# EAGLE board TD8Edaughter (EAGLE 6.6.0)
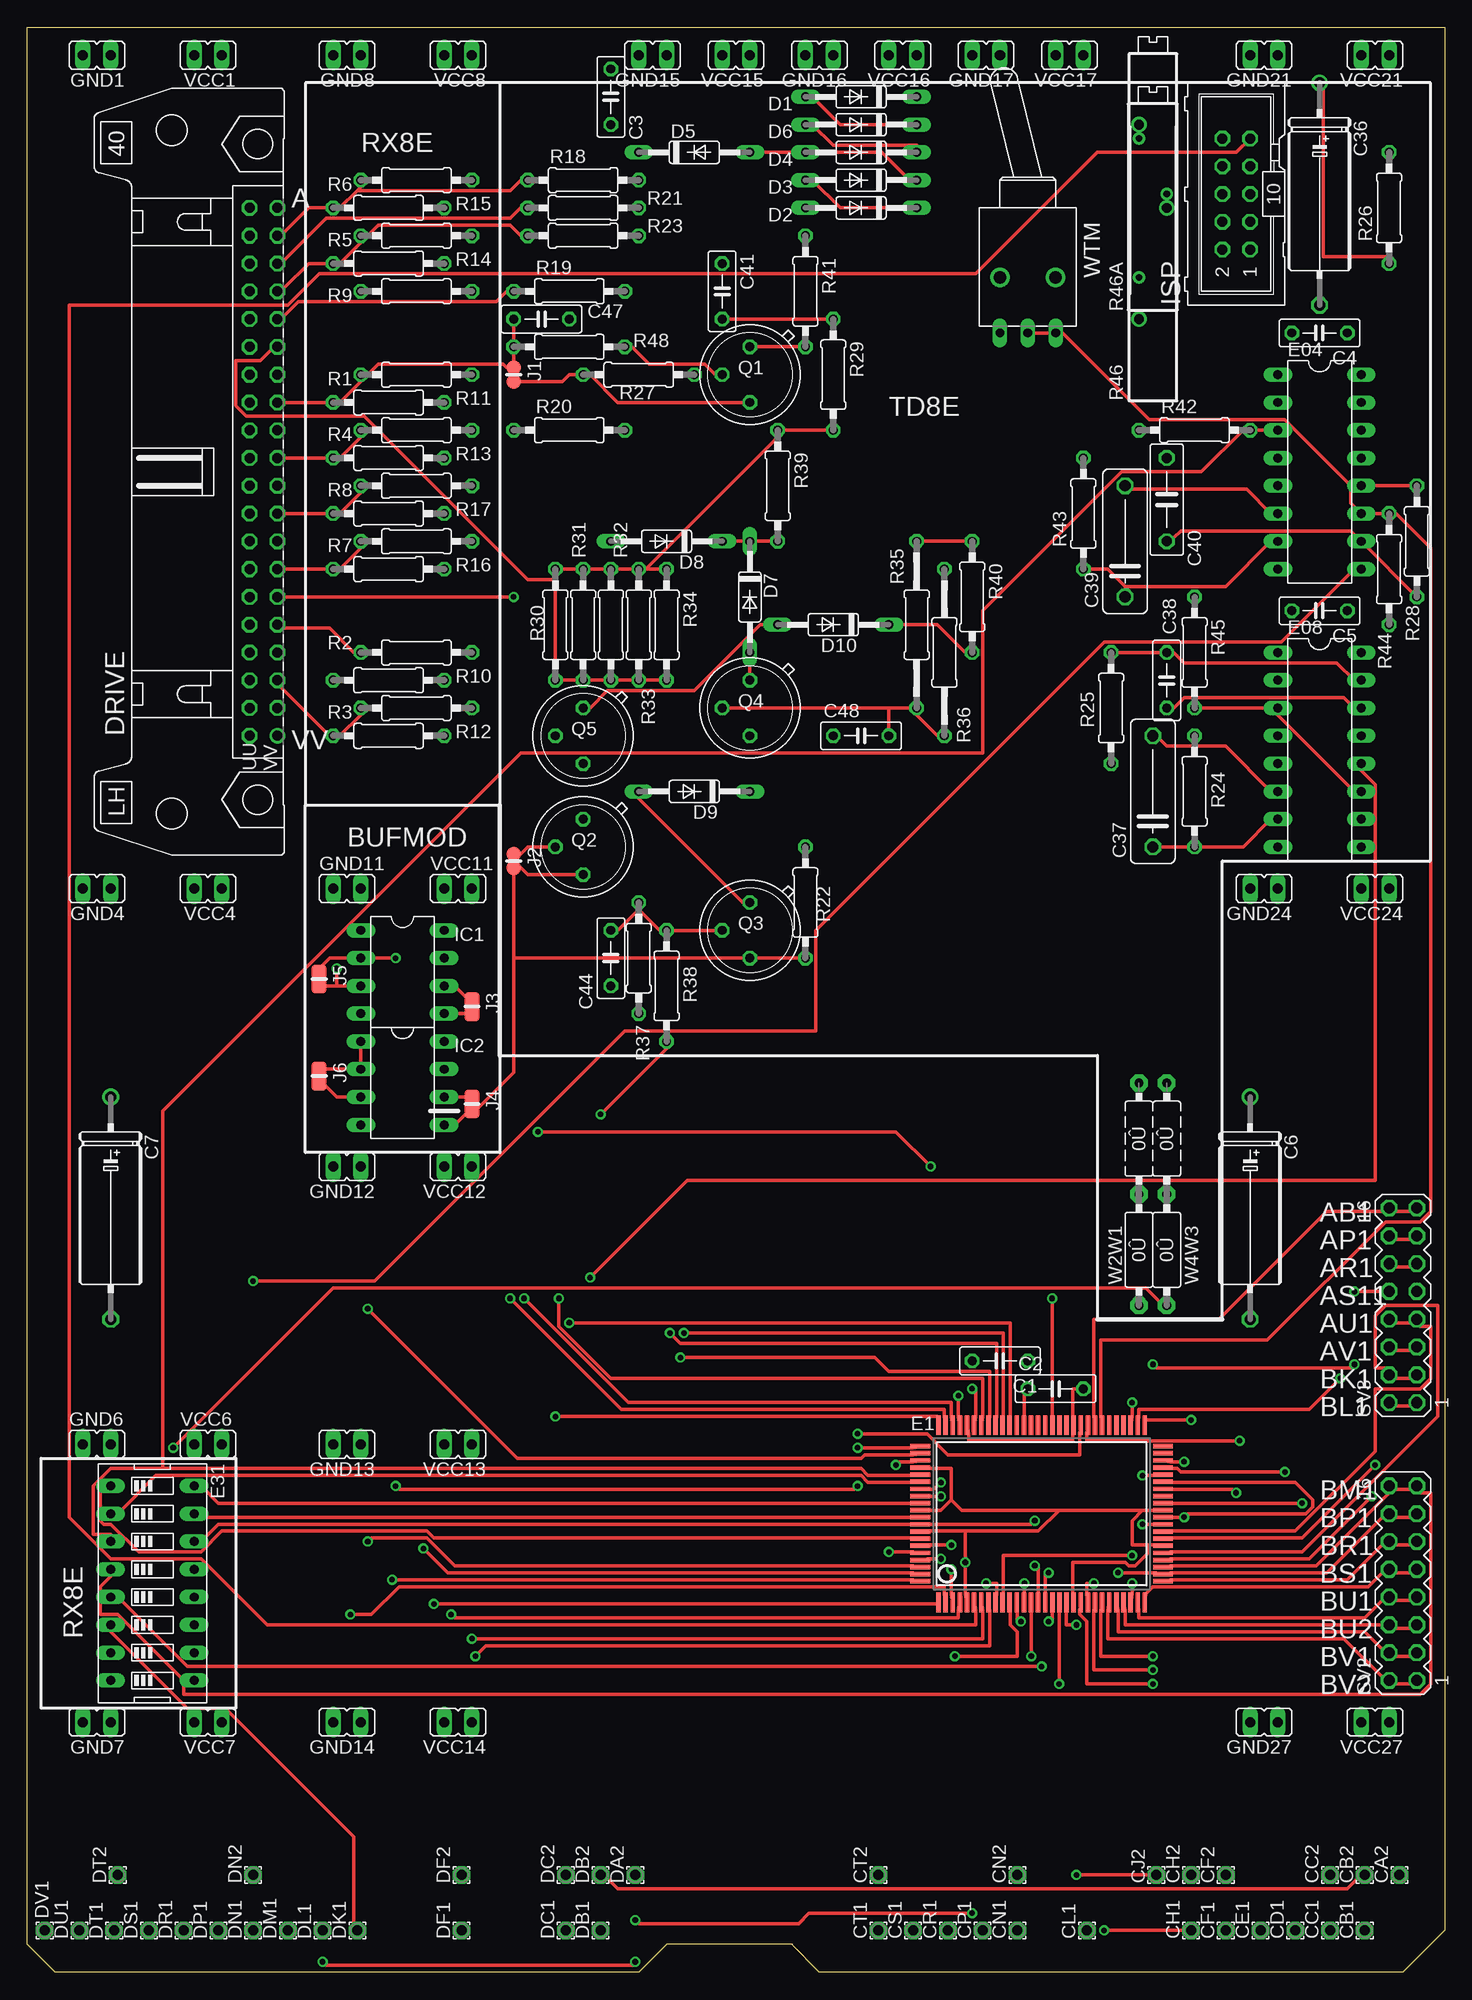
[diagram p0: board, top side]
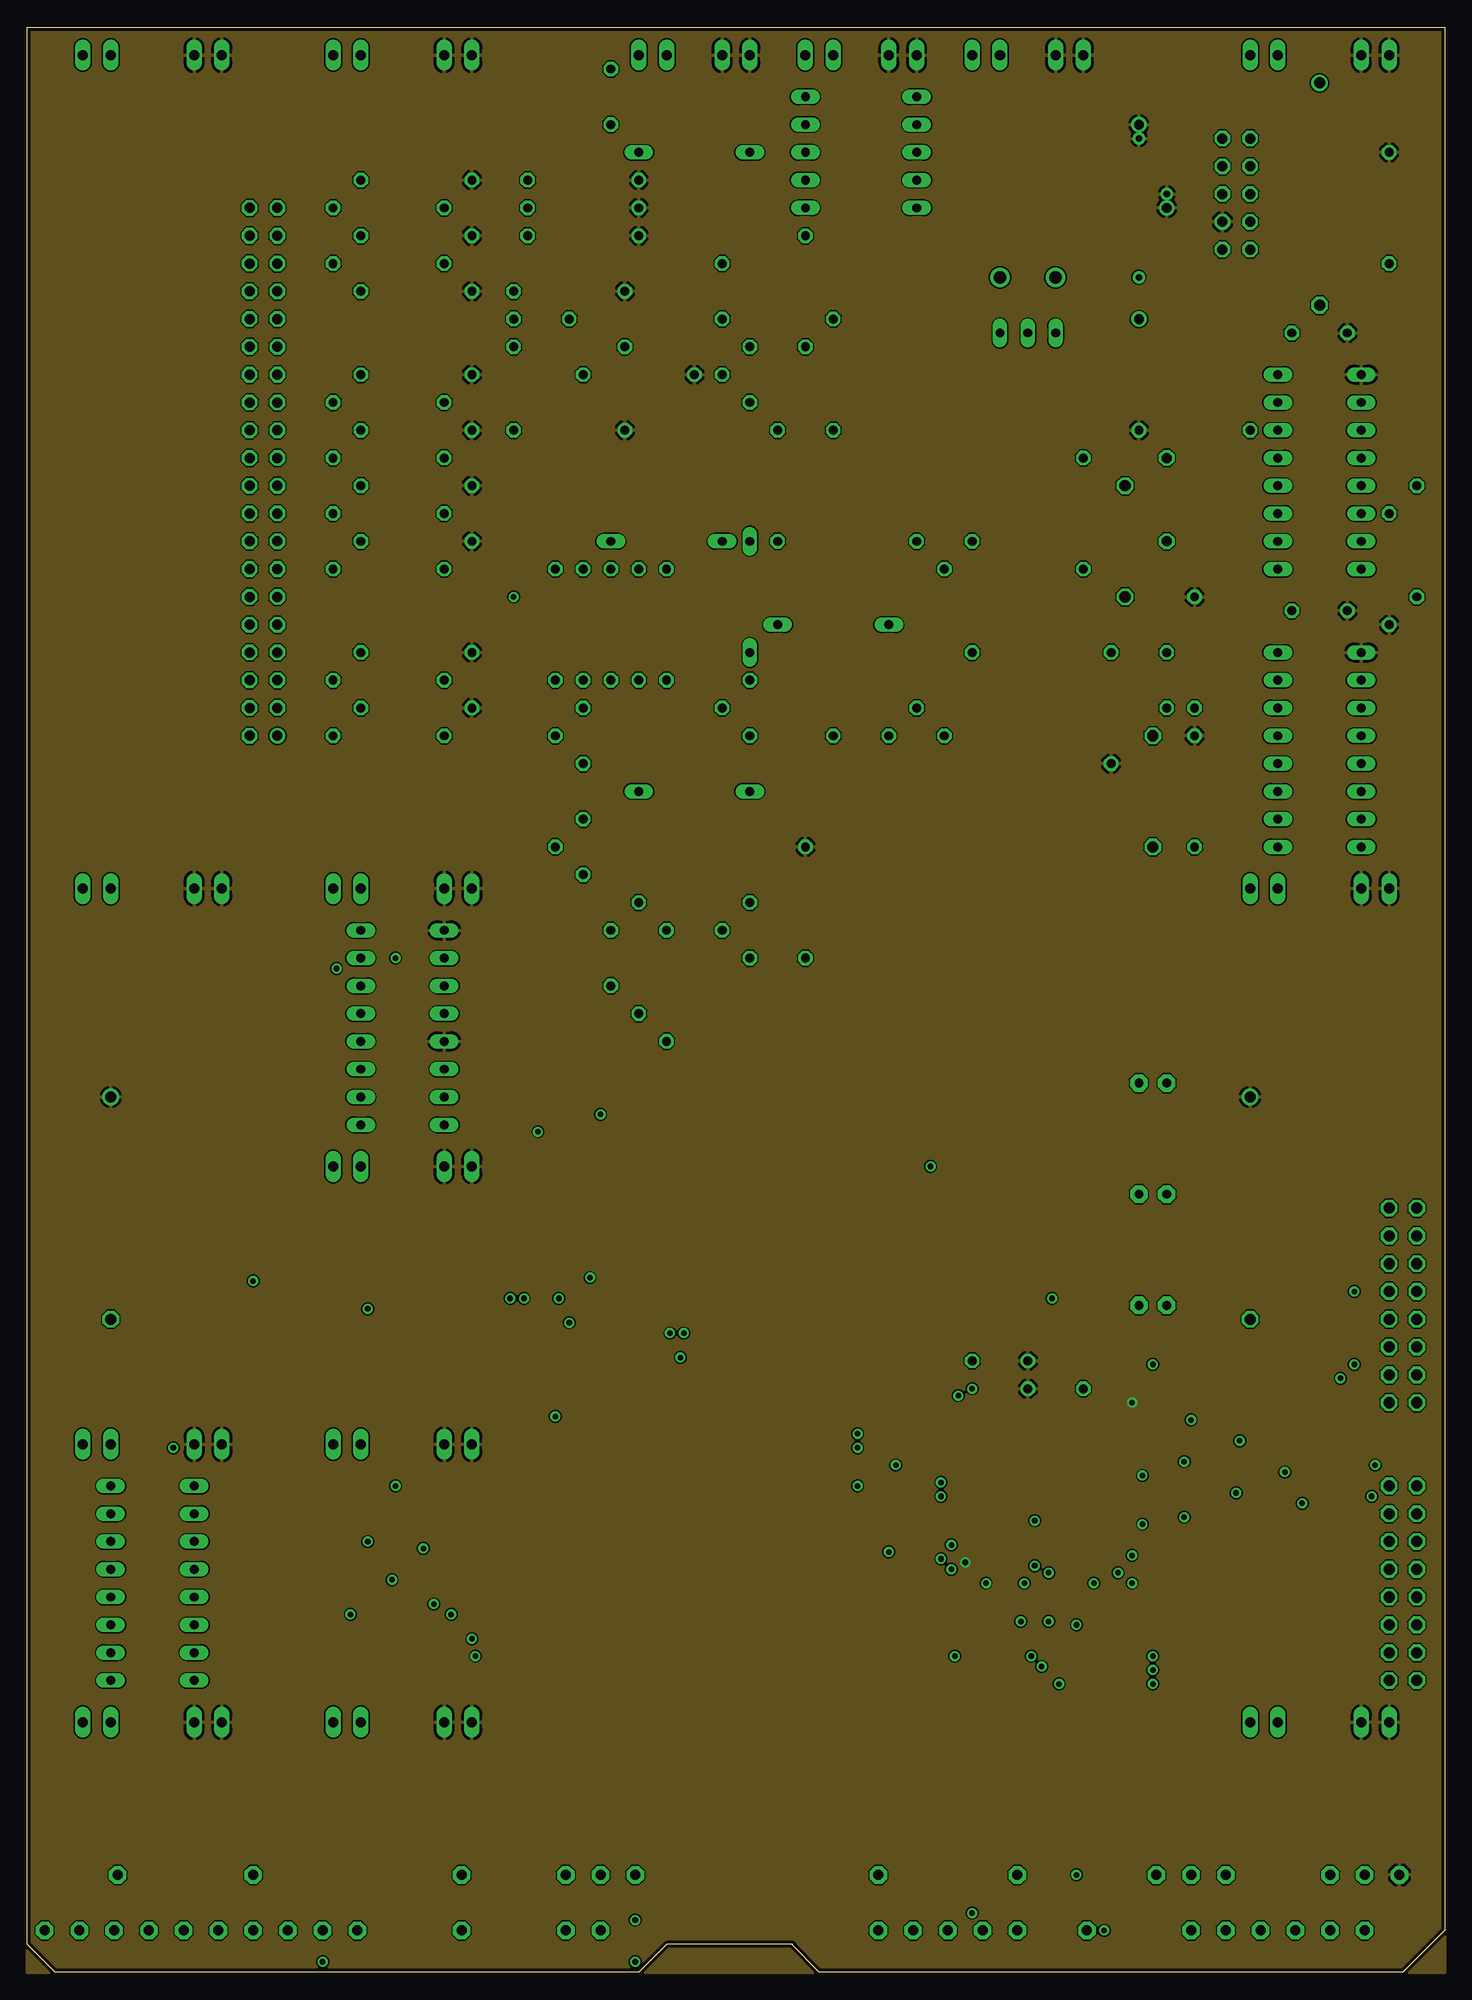
[diagram p1: board, inner layer VCC$]
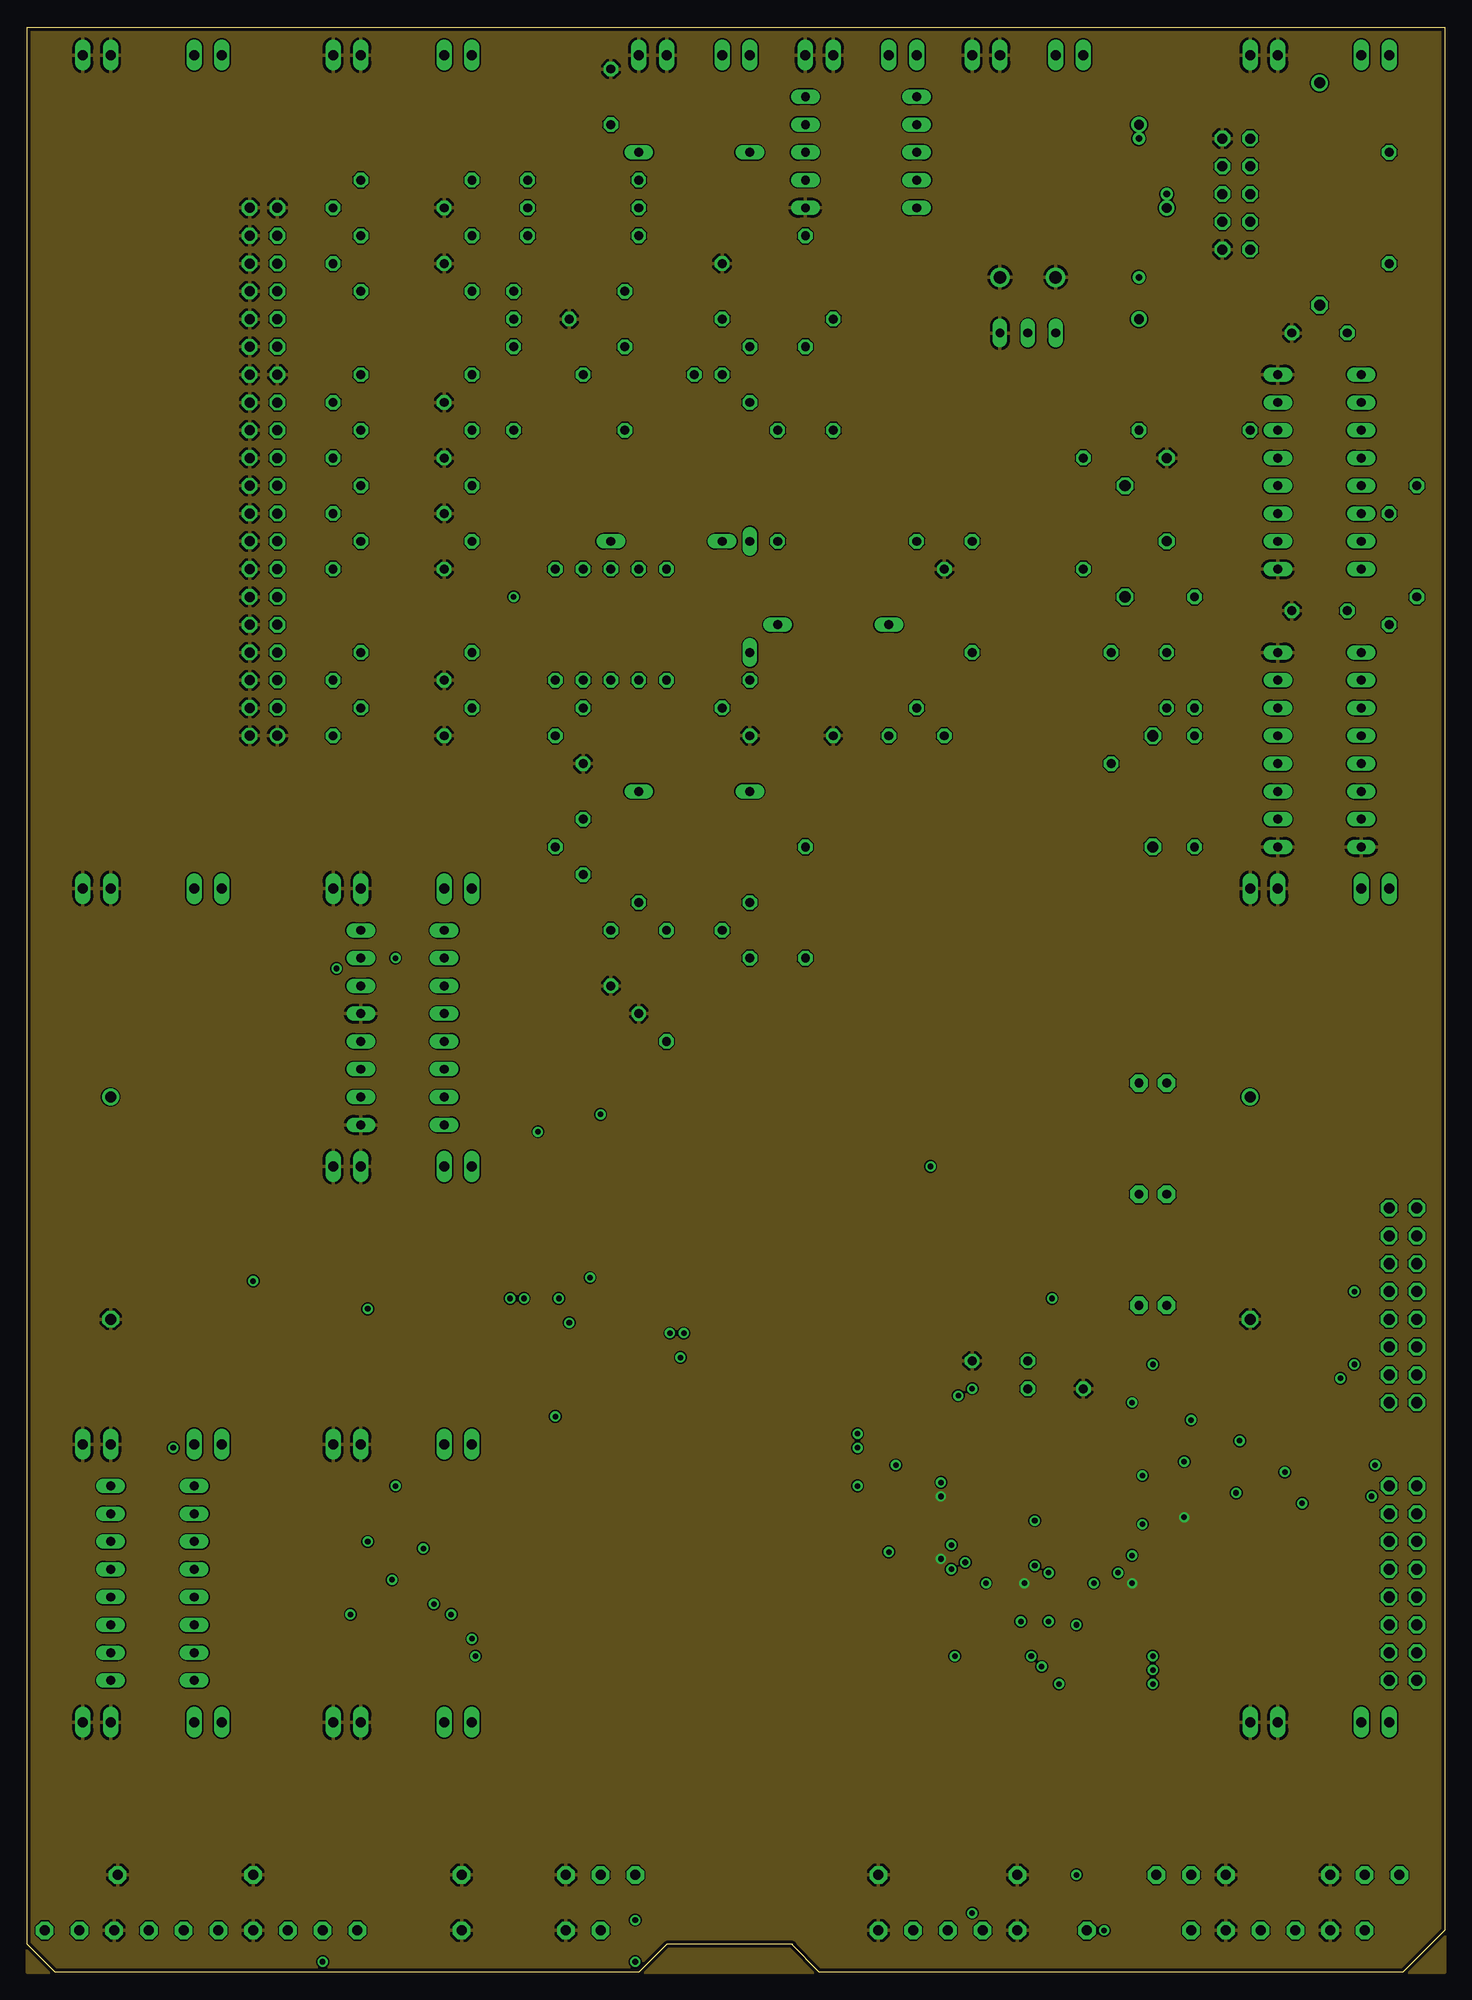
[diagram p2: board, inner layer GND$]
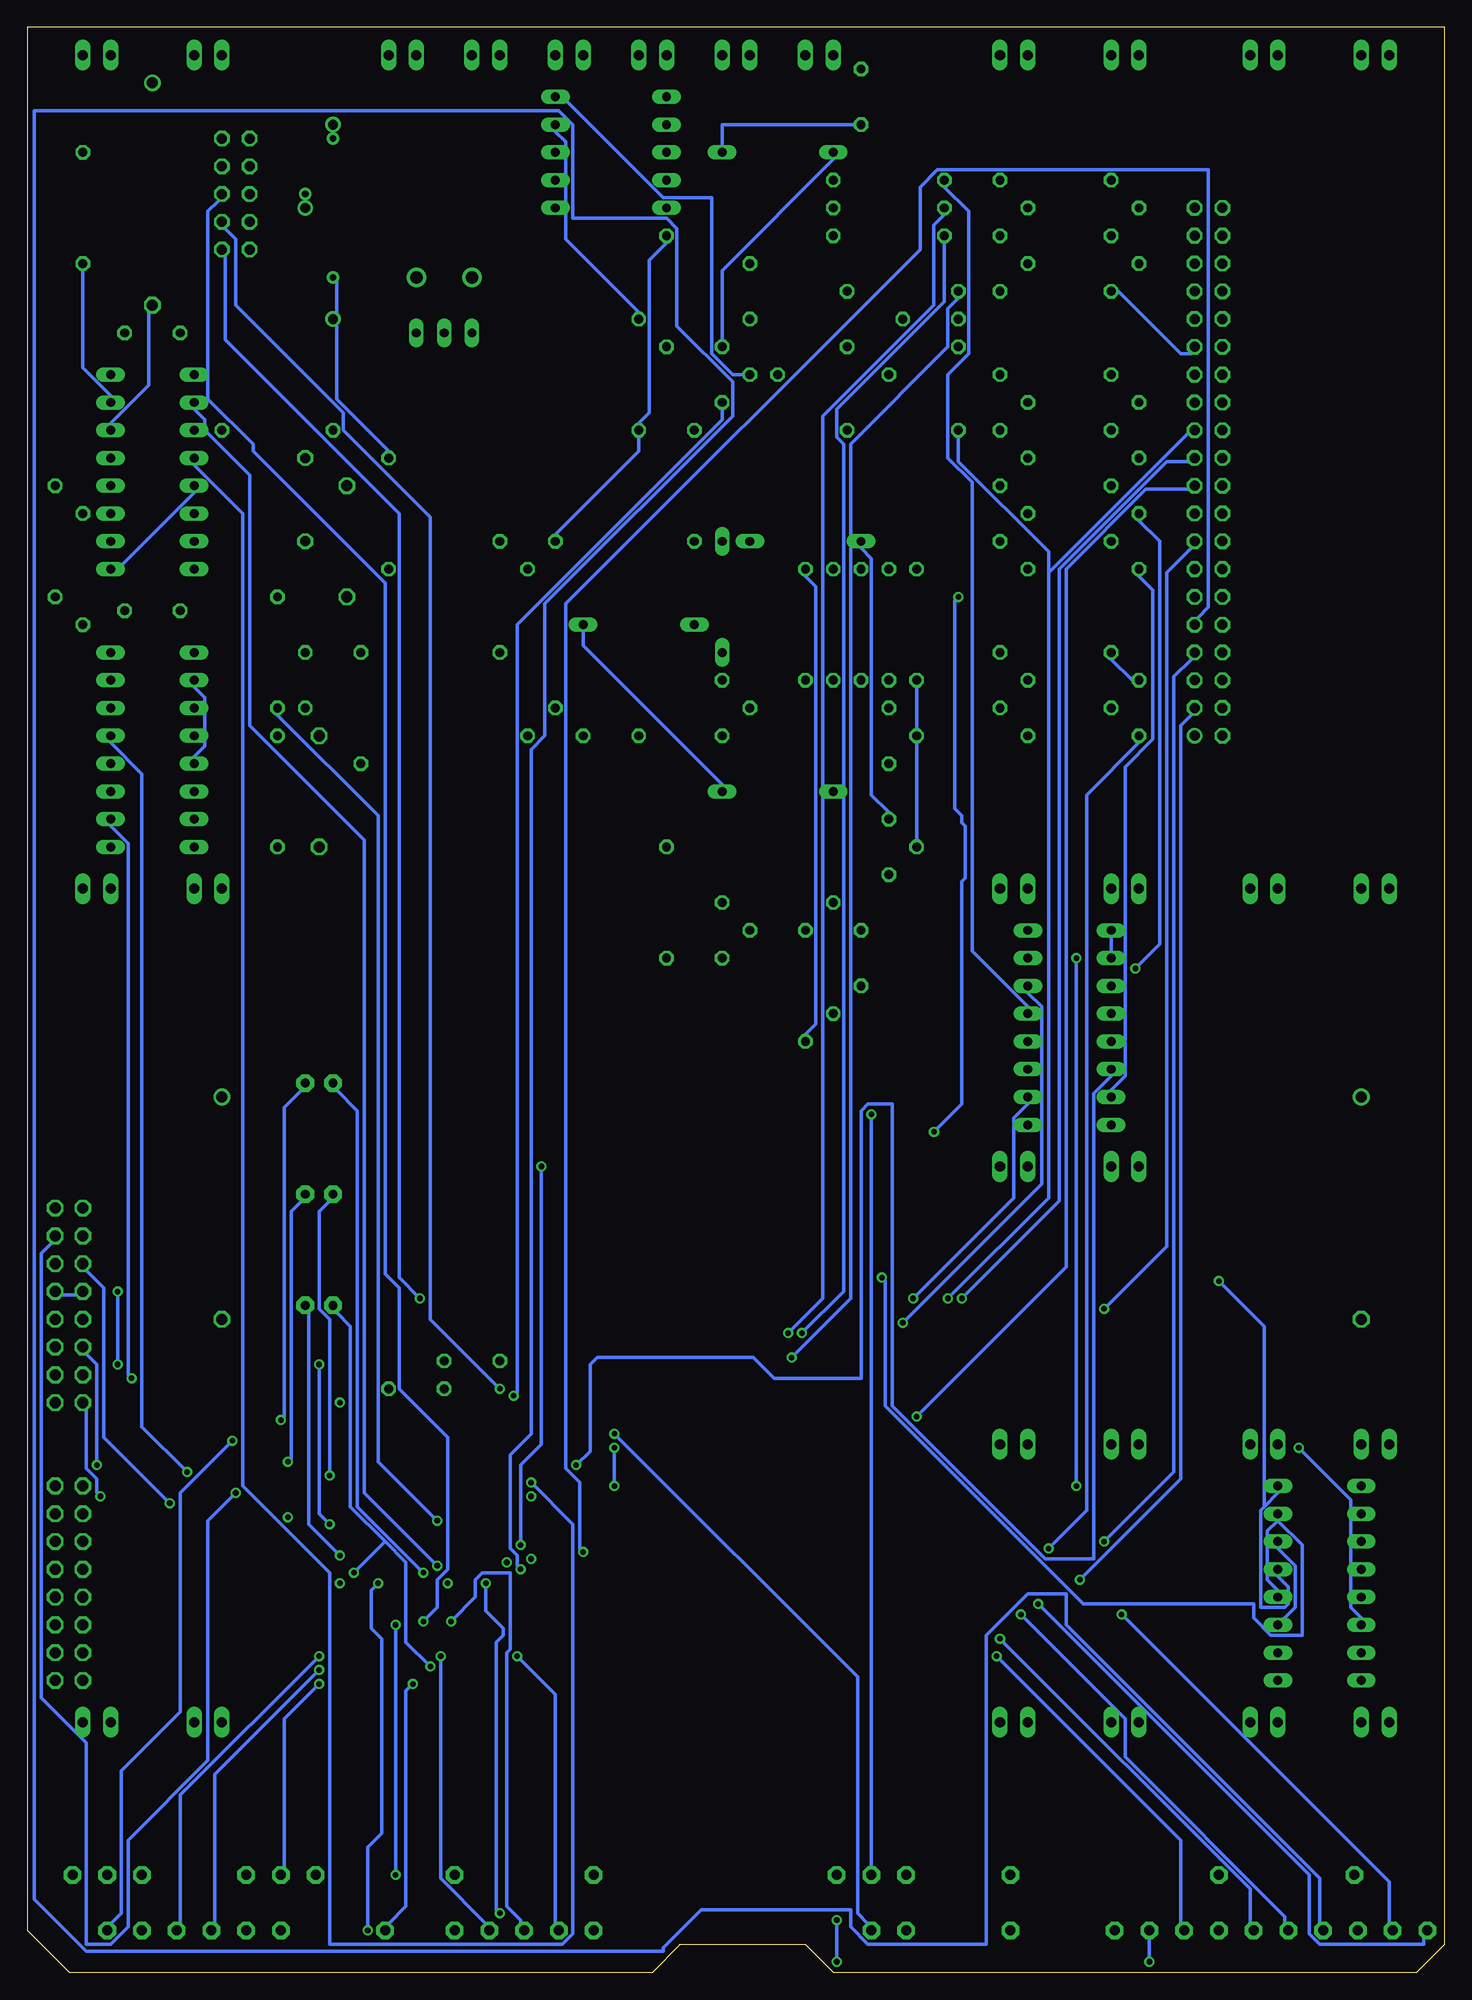
[diagram p3: board, bottom side, seen from below]

Size 129.54 x 177.8 mm. Coordinates in mm from the lower left corner, seen from the top.
Outline: 69.98,2.54 69.85,2.54
Outline: 69.85,2.54 72.39,0 125.73,0 129.54,3.81 129.54,177.8 0,177.8 0,2.54 2.54,0 55.88,0 58.42,2.54 69.85,2.54
Copper layers (1+2+3+16): Top 0.035mm / dielectric 1.5mm / VCC$ 0.035mm / dielectric 0.15mm / GND$ 0.035mm / dielectric 0.2mm / Bottom 0.035mm
Design rules "pld *": minimum track width 12mil, minimum drill 20mil, track to track 5mil, track to pad 5mil, pad to pad 5mil, via to via 10mil, smd to smd 5mil, copper to edge 13mil, drill to drill 10mil, minimum pad ring 10mil, minimum via ring 8mil, stop-mask expansion 0mil, vias tented up to drill 0mil, thermal gap 10mil

## Footprints (pad centres in the part's own frame; a part is rotated, then mirrored left to right if it is on the bottom)
C050-025X075 = drill 0.813 octagon: 1 -2.54,0; 2 2.54,0
E12-8 = drill 1.016: + -10.16,0 | drill 1.016 octagon: - 10.16,0
C102-043X133 = drill 1.016 octagon: 1 -5.08,0; 2 5.08,0
C075-032X103 = drill 0.914 octagon: 1 -3.81,0; 2 3.81,0
1,6/0,9 = drill 0.914 pad 1.6 octagon: 1 0,0
DO35-10 = drill 0.813 long: A 5.08,0; C -5.08,0
DEC40PINH = drill 0.914 octagon: A 24.13,1.27; AA -3.81,1.27; B 24.13,-1.27; BB -3.81,-1.27; C 21.59,1.27; CC -6.35,1.27; D 21.59,-1.27; DD -6.35,-1.27; E 19.05,1.27; EE -8.89,1.27; F 19.05,-1.27; FF -8.89,-1.27; H 16.51,1.27; HH -11.43,1.27; J 16.51,-1.27; JJ -11.43,-1.27; K 13.97,1.27; KK -13.97,1.27; L 13.97,-1.27; LL -13.97,-1.27; M 11.43,1.27; MM -16.51,1.27; N 11.43,-1.27; NN -16.51,-1.27; P 8.89,1.27; PP -19.05,1.27; R 8.89,-1.27; RR -19.05,-1.27; S 6.35,1.27; SS -21.59,1.27; T 6.35,-1.27; TT -21.59,-1.27; U 3.81,1.27; UU -24.13,1.27; V 3.81,-1.27; W 1.27,1.27; X 1.27,-1.27; Y -1.27,1.27; Z -1.27,-1.27 | drill 0.914: VV -24.13,-1.27
PQFP-100 = smd 0.4 x 1.8: 1 -9.425,-8.1; 2 -8.775,-8.1; 3 -8.125,-8.1; 4 -7.475,-8.1; 5 -6.825,-8.1; 6 -6.175,-8.1; 7 -5.525,-8.1; 8 -4.875,-8.1; 9 -4.225,-8.1; 10 -3.575,-8.1; 11 -2.925,-8.1; 12 -2.275,-8.1; 13 -1.625,-8.1; 14 -0.975,-8.1; 15 -0.325,-8.1; 16 0.325,-8.1; 17 0.975,-8.1; 18 1.625,-8.1; 19 2.275,-8.1; 20 2.925,-8.1; 21 3.575,-8.1; 22 4.225,-8.1; 23 4.875,-8.1; 24 5.525,-8.1; 25 6.175,-8.1; 26 6.825,-8.1; 27 7.475,-8.1; 28 8.125,-8.1; 29 8.775,-8.1; 30 9.425,-8.1; 51 9.425,8.1; 52 8.775,8.1; 53 8.125,8.1; 54 7.475,8.1; 55 6.825,8.1; 56 6.175,8.1; 57 5.525,8.1; 58 4.875,8.1; 59 4.225,8.1; 60 3.575,8.1; 61 2.925,8.1; 62 2.275,8.1; 63 1.625,8.1; 64 0.975,8.1; 65 0.325,8.1; 66 -0.325,8.1; 67 -0.975,8.1; 68 -1.625,8.1; 69 -2.275,8.1; 70 -2.925,8.1; 71 -3.575,8.1; 72 -4.225,8.1; 73 -4.875,8.1; 74 -5.525,8.1; 75 -6.175,8.1; 76 -6.825,8.1; 77 -7.475,8.1; 78 -8.125,8.1; 79 -8.775,8.1; 80 -9.425,8.1 | smd 1.8 x 0.4: 31 11.1,-6.175; 32 11.1,-5.525; 33 11.1,-4.875; 34 11.1,-4.225; 35 11.1,-3.575; 36 11.1,-2.925; 37 11.1,-2.275; 38 11.1,-1.625; 39 11.1,-0.975; 40 11.1,-0.325; 41 11.1,0.325; 42 11.1,0.975; 43 11.1,1.625; 44 11.1,2.275; 45 11.1,2.925; 46 11.1,3.575; 47 11.1,4.225; 48 11.1,4.875; 49 11.1,5.525; 50 11.1,6.175; 81 -11.1,6.175; 82 -11.1,5.525; 83 -11.1,4.875; 84 -11.1,4.225; 85 -11.1,3.575; 86 -11.1,2.925; 87 -11.1,2.275; 88 -11.1,1.625; 89 -11.1,0.975; 90 -11.1,0.325; 91 -11.1,-0.325; 92 -11.1,-0.975; 93 -11.1,-1.625; 94 -11.1,-2.275; 95 -11.1,-2.925; 96 -11.1,-3.575; 97 -11.1,-4.225; 98 -11.1,-4.875; 99 -11.1,-5.525; 100 -11.1,-6.175
DIL16 = drill 0.813 long: 1 -8.89,-3.81; 2 -6.35,-3.81; 3 -3.81,-3.81; 4 -1.27,-3.81; 5 1.27,-3.81; 6 3.81,-3.81; 7 6.35,-3.81; 8 8.89,-3.81; 9 8.89,3.81; 10 6.35,3.81; 11 3.81,3.81; 12 1.27,3.81; 13 -1.27,3.81; 14 -3.81,3.81; 15 -6.35,3.81; 16 -8.89,3.81
EDG-08 = drill 0.813 long: 1 -8.89,-3.81; 2 -6.35,-3.81; 3 -3.81,-3.81; 4 -1.27,-3.81; 5 1.27,-3.81; 6 3.81,-3.81; 7 6.35,-3.81; 8 8.89,-3.81; 9 8.89,3.81; 10 6.35,3.81; 11 3.81,3.81; 12 1.27,3.81; 13 -1.27,3.81; 14 -3.81,3.81; 15 -6.35,3.81; 16 -8.89,3.81
JP1 = drill 0.914 long: 1 0,-1.27; 2 0,1.27
DIL08 = drill 0.813 long: 1 -3.81,-3.81; 2 -1.27,-3.81; 3 1.27,-3.81; 4 3.81,-3.81; 5 3.81,3.81; 6 1.27,3.81; 7 -1.27,3.81; 8 -3.81,3.81
ML10 = drill 0.914 octagon: 1 -5.08,-1.27; 2 -5.08,1.27; 3 -2.54,-1.27; 4 -2.54,1.27; 5 0,-1.27; 6 0,1.27; 7 2.54,-1.27; 8 2.54,1.27; 9 5.08,-1.27; 10 5.08,1.27
NC1 = smd 1.346 x 1.346: 1 -0.635,0; 2 0.635,0
NC2 = smd 1.346 x 1.346: 1 -0.635,0; 2 0.635,0
TO5 = drill 0.813 octagon: 1 0,-2.54; 2 2.54,0; 3 0,2.54
0207/10 = drill 0.813 octagon: 1 -5.08,0; 2 5.08,0
0207/15 = drill 0.813 octagon: 1 -7.62,0; 2 7.62,0
3006Y = drill 0.9: 1 -8.89,1.27; 2 1.27,-1.27; 3 8.89,1.27
RTRIM3006P = drill 0.61: 1 -7.62,1.27; 2 0,-1.27; 3 5.08,1.27
MA08-2 = drill 1.016 octagon: 1 -8.89,-1.27; 2 -8.89,1.27; 3 -6.35,-1.27; 4 -6.35,1.27; 5 -3.81,-1.27; 6 -3.81,1.27; 7 -1.27,-1.27; 8 -1.27,1.27; 9 1.27,-1.27; 10 1.27,1.27; 11 3.81,-1.27; 12 3.81,1.27; 13 6.35,-1.27; 14 6.35,1.27; 15 8.89,-1.27; 16 8.89,1.27
0R2/10 = drill 0.813 pad 1.6 octagon: 1 -5.08,0; 2 5.08,0; 3 15.24,0
9070-1W = drill 0.813 long: 1 5.08,-2.54; 2 5.08,0; 3 5.08,2.54 | drill 1.118 pad 1.778: B 0,-2.54; B1 0,2.54

## Placement (x,y rotation side)
C1  .22uF  [C050-025X075]  88.9,55.88 180 top
C2  .22uF  [C050-025X075]  93.98,53.34 0 top
C3  .01uF  [C050-025X075]  53.34,171.45 270 top
C4  .01uF  [C050-025X075]  118.11,149.86 180 top
C5  .01uF  [C050-025X075]  118.11,124.46 180 top
C6  6.8uF  [E12-8]  111.76,69.85 270 top
C7  6.8uF  [E12-8]  7.62,69.85 270 top
C36  6.8uF  [E12-8]  118.11,162.56 270 top
C37  2700pF  [C102-043X133]  102.87,107.95 90 top
C38  27pF  [C050-025X075]  104.14,118.11 270 top
C39  2700pF  [C102-043X133]  100.33,130.81 90 top
C40  560pF  [C075-032X103]  104.14,134.62 90 top
C41  .01uF  [C050-025X075]  63.5,153.67 270 top
C44  .01uF  [C050-025X075]  53.34,92.71 90 top
C47  .01uF  [C050-025X075]  46.99,151.13 0 top
C48  .01uF  [C050-025X075]  76.2,113.03 0 top
CA2  [1,6/0,9]  125.41,8.89 90 top
CB1  [1,6/0,9]  122.24,3.81 90 top
CB2  [1,6/0,9]  122.24,8.89 90 top
CC1  [1,6/0,9]  119.06,3.81 90 top
CC2  [1,6/0,9]  119.06,8.89 90 top
CD1  [1,6/0,9]  115.89,3.81 90 top
CE1  [1,6/0,9]  112.71,3.81 90 top
CF1  [1,6/0,9]  109.54,3.81 90 top
CF2  [1,6/0,9]  109.54,8.89 90 top
CH1  [1,6/0,9]  106.36,3.81 90 top
CH2  [1,6/0,9]  106.36,8.89 90 top
CJ2  [1,6/0,9]  103.19,8.89 90 top
CL1  [1,6/0,9]  96.84,3.81 90 top
CN1  [1,6/0,9]  90.49,3.81 90 top
CN2  [1,6/0,9]  90.49,8.89 90 top
CP1  [1,6/0,9]  87.31,3.81 90 top
CR1  [1,6/0,9]  84.14,3.81 90 top
CS1  [1,6/0,9]  80.96,3.81 90 top
CT1  [1,6/0,9]  77.79,3.81 90 top
CT2  [1,6/0,9]  77.79,8.89 90 top
D1  1N4154  [DO35-10]  76.2,171.45 180 top
D2  1N4148  [DO35-10]  76.2,161.29 180 top
D3  1N4148  [DO35-10]  76.2,163.83 180 top
D4  1N4148  [DO35-10]  76.2,166.37 180 top
D5  1N4154  [DO35-10]  60.96,166.37 0 top
D6  1N4148  [DO35-10]  76.2,168.91 180 top
D7  1N4154  [DO35-10]  66.04,125.73 270 top
D8  1N4154  [DO35-10]  58.42,130.81 180 top
D9  1N4154  [DO35-10]  60.96,107.95 180 top
D10  1N4154  [DO35-10]  73.66,123.19 180 top
DA2  [1,6/0,9]  55.56,8.89 90 top
DB1  [1,6/0,9]  52.39,3.81 90 top
DB2  [1,6/0,9]  52.39,8.89 90 top
DC1  [1,6/0,9]  49.21,3.81 90 top
DC2  [1,6/0,9]  49.21,8.89 90 top
DF1  [1,6/0,9]  39.69,3.81 90 top
DF2  [1,6/0,9]  39.69,8.89 90 top
DK1  [1,6/0,9]  30.16,3.81 90 top
DL1  [1,6/0,9]  26.99,3.81 90 top
DM1  [1,6/0,9]  23.81,3.81 90 top
DN1  [1,6/0,9]  20.64,3.81 90 top
DN2  [1,6/0,9]  20.64,8.89 90 top
DP1  [1,6/0,9]  17.46,3.81 90 top
DR1  [1,6/0,9]  14.29,3.81 90 top
DRIVE  [DEC40PINH]  21.59,137.16 90 top
DS1  [1,6/0,9]  11.11,3.81 90 top
DT1  [1,6/0,9]  7.94,3.81 90 top
DT2  [1,6/0,9]  8.26,8.89 90 top
DU1  [1,6/0,9]  4.76,3.81 90 top
DV1  [1,6/0,9]  1.59,3.81 90 top
E1  ATF150X100PQFP  [PQFP-100]  92.71,41.91 0 top
E04  74123N  [DIL16]  118.11,137.16 270 top
E08  74123N  [DIL16]  118.11,111.76 270 top
E31  [EDG-08]  11.43,35.56 270 top
GND1  [JP1]  6.35,175.26 90 top
GND4  [JP1]  6.35,99.06 90 top
GND6  [JP1]  6.35,48.26 270 top
GND7  [JP1]  6.35,22.86 90 top
GND8  [JP1]  29.21,175.26 90 top
GND11  [JP1]  29.21,99.06 270 top
GND12  [JP1]  29.21,73.66 90 top
GND13  [JP1]  29.21,48.26 90 top
GND14  [JP1]  29.21,22.86 90 top
GND15  [JP1]  57.15,175.26 90 top
GND16  [JP1]  72.39,175.26 90 top
GND17  [JP1]  87.63,175.26 90 top
GND21  [JP1]  113.03,175.26 90 top
GND24  [JP1]  113.03,99.06 90 top
GND27  [JP1]  113.03,22.86 90 top
IC1  DS75453N  [DIL08]  34.29,91.44 270 top
IC2  DS75453N  [DIL08]  34.29,81.28 270 top
ISP  [ML10]  110.49,162.56 90 top
J1  JUMPER-NC  [NC1]  44.45,146.05 270 top
J2  JUMPER-NC  [NC1]  44.45,101.6 270 top
J3  JUMPER-NC2  [NC2]  40.64,88.27 270 top
J4  JUMPER-NC2  [NC2]  40.64,79.38 270 top
J5  JUMPER-NC2  [NC2]  26.67,90.81 270 top
J6  JUMPER-NC2  [NC2]  26.67,81.92 270 top
Q1  MPS6534  [TO5]  66.04,146.05 180 top
Q2  MPS6534  [TO5]  50.8,102.87 180 top
Q3  MPS6534  [TO5]  66.04,95.25 180 top
Q4  MPS6534  [TO5]  66.04,115.57 180 top
Q5  MPS6534  [TO5]  50.8,113.03 180 top
R1  180  [0207/10]  35.56,146.05 0 top
R2  180  [0207/10]  35.56,120.65 0 top
R3  180  [0207/10]  35.56,115.57 0 top
R4  180  [0207/10]  35.56,140.97 0 top
R5  180  [0207/10]  35.56,158.75 0 top
R6  180  [0207/10]  35.56,163.83 0 top
R7  180  [0207/10]  35.56,130.81 0 top
R8  180  [0207/10]  35.56,135.89 0 top
R9  120  [0207/10]  35.56,153.67 0 top
R10  390  [0207/10]  33.02,118.11 180 top
R11  390  [0207/10]  33.02,143.51 180 top
R12  390  [0207/10]  33.02,113.03 180 top
R13  390  [0207/10]  33.02,138.43 180 top
R14  390  [0207/10]  33.02,156.21 180 top
R15  390  [0207/10]  33.02,161.29 180 top
R16  390  [0207/10]  33.02,128.27 180 top
R17  390  [0207/10]  33.02,133.35 180 top
R18  270  [0207/10]  50.8,163.83 0 top
R19  270  [0207/10]  49.53,153.67 0 top
R20  270  [0207/10]  49.53,140.97 0 top
R21  270  [0207/10]  50.8,161.29 0 top
R22  6.8K  [0207/10]  71.12,97.79 90 top
R23  270  [0207/10]  50.8,158.75 0 top
R24  10K  [0207/10]  106.68,107.95 90 top
R25  4.7K  [0207/10]  99.06,115.57 270 top
R26  51K  [0207/10]  124.46,161.29 90 top
R27  1.5K  [0207/10]  55.88,146.05 0 top
R28  220  [0207/10]  127,130.81 90 top
R29  1.5K  [0207/10]  73.66,146.05 270 top
R30  1K  [0207/10]  48.26,123.19 270 top
R31  1K  [0207/10]  50.8,123.19 270 top
R32  1K  [0207/10]  53.34,123.19 270 top
R33  1K  [0207/10]  55.88,123.19 270 top
R34  1K  [0207/10]  58.42,123.19 270 top
R35  1.21K 1%  [0207/15]  81.28,123.19 270 top
R36  562 1%  [0207/15]  83.82,120.65 90 top
R37  1.5K  [0207/10]  55.88,92.71 270 top
R38  1K  [0207/10]  58.42,90.17 90 top
R39  1.5K  [0207/10]  68.58,135.89 270 top
R40  1K  [0207/10]  86.36,125.73 270 top
R41  3K  [0207/10]  71.12,153.67 270 top
R42  1K  [0207/10]  106.68,140.97 0 top
R43  4.7K  [0207/10]  96.52,133.35 90 top
R44  1.5K  [0207/10]  124.46,128.27 270 top
R45  1K  [0207/10]  106.68,120.65 270 top
R46  20K  [3006Y]  102.87,160.02 90 top
R46A  20K  [RTRIM3006P]  102.87,162.56 90 top
R48  470  [0207/10]  49.53,148.59 0 top
SV2  [MA08-2]  125.73,35.56 90 top
SV3  [MA08-2]  125.73,60.96 90 top
VCC1  [JP1]  16.51,175.26 90 top
VCC4  [JP1]  16.51,99.06 90 top
VCC6  [JP1]  16.51,48.26 270 top
VCC7  [JP1]  16.51,22.86 90 top
VCC8  [JP1]  39.37,175.26 90 top
VCC11  [JP1]  39.37,99.06 270 top
VCC12  [JP1]  39.37,73.66 90 top
VCC13  [JP1]  39.37,48.26 90 top
VCC14  [JP1]  39.37,22.86 90 top
VCC15  [JP1]  64.77,175.26 90 top
VCC16  [JP1]  80.01,175.26 90 top
VCC17  [JP1]  95.25,175.26 90 top
VCC21  [JP1]  123.19,175.26 90 top
VCC24  [JP1]  123.19,99.06 90 top
VCC27  [JP1]  123.19,22.86 90 top
W2W1  [0R2/10]  101.6,66.04 90 top
W4W3  [0R2/10]  104.14,66.04 90 top
WTM  [9070-1W]  91.44,154.94 270 top

## Library data of the parts
C1-C5 C37-C41 C44 C47 C48 R1-R45 R46A R48 = rcl
C6 C7 C36 DRIVE IC1 IC2 J1-J6 R46 = dec-con
CA2 CB1 CB2 CC1 CC2 CD1 CE1 CF1 CF2 CH1 CH2 CJ2 CL1 CN1 CN2 CP1 CR1 CS1 CT1 CT2 DA2 DB1 DB2 DC1 DC2 DF1 DF2 DK1 DL1 DM1 DN1 DN2 DP1 DR1 DS1 DT1 DT2 DU1 DV1 = wirepad
D1-D10 = diode
E1 = atmel-cpld
E04 E08 = 74xx-us
E31 = special
GND1 GND4 GND6-GND8 GND11-GND17 GND21 GND24 GND27 VCC1 VCC4 VCC6-VCC8 VCC11-VCC17 VCC21 VCC24 VCC27 W2W1 W4W3 = jumper
ISP = con-harting-ml; OC_FARNELL: unknown; OC_NEWARK: unknown
Q1-Q5 = transistor-npn
SV2 SV3 = con-lstb; OC_FARNELL: unknown; OC_NEWARK: unknown
WTM = switch

## Nets
!C0: CE1.1 E1.23
!C1: CH1.1 E1.22
!CC_TPG_CLK: C40.1 E04.10 R28.1
!DATA0: E1.42 SV3.11 SV3.12
!DATA1: E1.39 SV3.9 SV3.10
!DATA2: E1.38 SV3.7 SV3.8
!DATA3: E1.37 SV3.5 SV3.6
!DATA4: E1.31 SV2.11 SV2.12
!DATA5: E1.30 SV2.9 SV2.10
!DATA6: E1.29 SV2.7 SV2.8
!DATA7: E1.26 SV2.3 SV2.4
!DATA8: DR1.1 E1.4
!DATA9: DS1.1 E1.3
!DATA10: DU1.1 E1.2
!DATA11: DV1.1 E1.1
!DF_SEL_ER: IC2.5 J2.2 J4.2 Q2.3 Q3.3 R22.1
!DONE_SKIP: CB1.1 E1.59
!INT_RQST: CP1.1 E1.14
!INTERNAL_IO: CL1.1 E1.18
!IO_PAUSE: CD1.1 E1.24
!MD03: E1.44 SV3.13 SV3.14
!MD04: E1.35 SV3.3 SV3.4
!MD05: E1.34 SV3.1 SV3.2
!MD06: E1.33 E31.4 SV2.15 SV2.16
!MD07: E1.32 E31.5 SV2.13 SV2.14 W2W1.1
!MD08: DK1.1 E1.10 E31.6 W4W3.1
!MD09: DL1.1 E1.9
!MD10: DM1.1 E1.8
!MD11: DP1.1 E1.7
!POWER_OK: E1.25 SV2.1 SV2.2
!SKIP: CS1.1 E1.11
!TR_SKIP: DB1.1 E1.60
+15V: DA2.1
-1.5V: C3.2 D3.C D4.A D5.A
-3V: C41.2 D1.A D6.C R29.1
-4.7V: C48.2 Q4.2 R35.2 R36.1
-9V: C44.2 Q3.2 R37.1 R38.2
-15V [supply]: CB2.1 DB2.1 R29.2 R30.1 R31.1 R32.1 R33.1 R34.1 R35.1 R38.1 R39.1 R40.1 R41.1
BB: DRIVE.BB IC1.3 J5.2 R8.1 R17.2
BB-CPLD: E1.81 IC1.1 IC1.2 J5.1
CC_DTP: E1.47 E08.13
CC_SETDLY: E1.15 E04.2
CC_T/M_EN: E1.57 E04.11 R44.1 WTM.2 WTM.3
CC_TPG_CLK: E1.89 E04.5 E04.9 E31.13 E31.16
CC_TT_EN: E1.52 E08.10
D: DRIVE.D IC1.5 J3.2 R6.1 R15.2 R18.1
D-CPLD: E1.70 IC1.6 IC1.7 J3.1
DD: DRIVE.DD E1.82
F: DRIVE.F E1.71 R21.1
FF: DRIVE.FF IC2.3 J6.2 R7.1 R16.2
FF-CPLD: E1.83 IC2.1 IC2.2 J6.1
GND [supply]: C1.2 C2.2 C3.1 C4.2 C5.2 C6.- C7.- C40.2 C41.1 C44.1 C47.2 C48.1 CC1.1 CC2.1 CF1.1 CF2.1 CN1.1 CN2.1 CT1.1 CT2.1 D2.A DC1.1 DC2.1 DF1.1 DF2.1 DN1.1 DN2.1 DRIVE.A DRIVE.AA DRIVE.B DRIVE.C DRIVE.CC DRIVE.E DRIVE.EE DRIVE.H DRIVE.HH DRIVE.K DRIVE.KK DRIVE.M DRIVE.MM DRIVE.P DRIVE.PP DRIVE.R DRIVE.S DRIVE.SS DRIVE.U DRIVE.UU DRIVE.VV DRIVE.W DRIVE.Y DT1.1 DT2.1 E1.13 E1.28 E1.40 E1.45 E1.61 E1.76 E1.88 E1.97 E04.1 E04.8 E08.1 E08.8 E08.9 GND1.1 GND1.2 GND4.1 GND4.2 GND6.1 GND6.2 GND7.1 GND7.2 GND8.1 GND8.2 GND11.1 GND11.2 GND12.1 GND12.2 GND13.1 GND13.2 GND14.1 GND14.2 GND15.1 GND15.2 GND16.1 GND16.2 GND17.1 GND17.2 GND21.1 GND21.2 GND24.1 GND24.2 GND27.1 GND27.2 IC1.4 IC2.4 ISP.2 ISP.10 Q4.3 Q5.3 R10.1 R11.1 R12.1 R13.1 R14.1 R15.1 R16.1 R17.1 R36.2 R37.2 WTM.1 WTM.B WTM.B1
IN1: E1.92 E08.3 E08.11 E31.11 E31.14 R45.2
IN2: E1.91 E08.12 E31.12 E31.15
IN3: E1.87 E04.4
INITIALIZE: CR1.1 E1.12
IO69: E1.85 E04.3 E31.3 R42.2
J: DRIVE.J E1.72 R5.1 R14.2 R23.1
JJ: DRIVE.JJ E1.95
L: DRIVE.L E1.73 R19.1
LL: DRIVE.LL E1.96 R2.1 R10.2
N$18: E1.86 E31.2
N$19: E1.94 E31.1
N$51: D1.C Q1.2 R48.2
N$52: D5.C Q1.1 R41.2
N$54: D2.C D3.A
N$55: D9.C D10.C R40.2
N$56: D4.C D6.A
N$57: D10.A Q5.1
N$58: D9.A Q3.1
N$59: D8.A Q2.1
N$60: D7.A Q4.1
N$63: D7.C D8.C R39.2
N$77: E08.2 E08.5
N$78: C37.1 E08.7 R24.1
N$79: C38.1 E08.15 R25.1
N$81: C38.2 E08.14
N$82: C37.2 E08.6
N$94: C36.+ E04.15 R26.1
N$95: C36.- E04.14
N$108: C39.1 E04.7 R43.1
N$110: C39.2 E04.6
N$111: R43.2 R46.1 R46A.1
N$112: E04.12 R28.2
N-CPLD: E1.74 IC2.6 IC2.7 J4.1
N-DRIVE: DRIVE.N J2.1 Q2.2 Q5.2 R9.1 R30.2 R31.2 R32.2 R33.2 R34.2
NN: DRIVE.NN E1.98
PARITY: E1.58 SV3.15 SV3.16
RR: DRIVE.RR E1.99 R3.1 R12.2
RUN: E1.27 SV2.5 SV2.6
T-CPLD: E1.77 J1.2 Q1.3 R27.1
T-DRIVE: C47.1 DRIVE.T J1.1 R1.1 R11.2 R48.1
TCK: E1.64 ISP.1
TDI: E1.6 ISP.9
TDO: E1.75 ISP.3
TMS: E1.17 ISP.5
TP3: CH2.1 E1.21
TP4: CJ2.1 E1.19
TT: DRIVE.TT E1.100
V: DRIVE.V E1.78 R20.1
VCC [supply]: C1.1 C2.1 C4.1 C5.1 C6.+ C7.+ CA2.1 E1.5 E1.20 E1.36 E1.41 E1.53 E1.68 E1.84 E1.90 E1.93 E04.16 E08.16 IC1.8 IC2.8 ISP.4 R1.2 R2.2 R3.2 R4.2 R5.2 R6.2 R7.2 R8.2 R9.2 R18.2 R19.2 R20.2 R21.2 R22.2 R23.2 R24.2 R25.2 R26.2 R27.2 R42.1 R44.2 R45.1 R46.2 R46.3 R46A.2 R46A.3 VCC1.1 VCC1.2 VCC4.1 VCC4.2 VCC6.1 VCC6.2 VCC7.1 VCC7.2 VCC8.1 VCC8.2 VCC11.1 VCC11.2 VCC12.1 VCC12.2 VCC13.1 VCC13.2 VCC14.1 VCC14.2 VCC15.1 VCC15.2 VCC16.1 VCC16.2 VCC17.1 VCC17.2 VCC21.1 VCC21.2 VCC24.1 VCC24.2 VCC27.1 VCC27.2
W2: E1.16 W2W1.3
W2W1: E1.46 W2W1.2
W3: E1.51 W4W3.3
W4W3: E1.48 W4W3.2
X: DRIVE.X E1.79 R4.1 R13.2
Z: DRIVE.Z E1.80

## Tracks (layer width: path | path; a pad name or v marks a point on that pad's centre or on a via)
!C0  (via drill 0.51)
  Top 0.305: v102.87,27.62 97.47,27.62 97.47,33.02 E1.23
  Bottom 0.305: v102.87,27.62 112.39,18.1 112.39,4.45 CE1.1
!C1  (via drill 0.51)
  Top 0.305: v97.47,35.56 96.84,35.56 96.84,34.61 E1.22 | v98.42,3.81 CH1.1
  Bottom 0.305: v97.47,35.56 98.11,34.92 98.11,31.43 97.16,30.48 97.16,12.7 98.42,11.43 v98.42,3.81
!CC_TPG_CLK
  Top 0.305: R28.1 E04.10 120.97,131.76 105.41,131.76 104.78,131.13 C40.1
!DATA0  (via drill 0.51)
  Top 0.305: v116.52,42.86 104.46,42.86 E1.42 | SV3.11 126.36,64.45 125.09,64.45 SV3.12
  Bottom 0.305: v116.52,42.86 122.56,48.9 122.56,62.55 124.14,64.14 SV3.12
!DATA1  (via drill 0.51)
  Top 0.305: v101.92,40.96 103.19,40.96 E1.39 | v102.87,55.56 103.19,55.24 120.97,55.24 v121.28,55.56 | v121.28,62.23 SV3.10
  Bottom 0.305: SV3.9 126.36,61.91 125.09,61.91 SV3.10 | v101.92,40.96 102.87,41.91 v102.87,55.56 | v121.28,55.56 v121.28,62.23
!DATA2
  Top 0.305: E1.38 104.46,40.32 115.89,40.32 123.19,47.62 123.19,53.34 127.32,53.34 128.27,54.29 128.27,59.05 127.32,59.05 SV3.7 126.36,59.37 125.09,59.37 SV3.8
!DATA3  (via drill 0.51)
  Top 0.305: v123.19,46.35 116.52,39.69 104.46,39.69 E1.37 | SV3.5 126.36,56.83 125.09,56.83 SV3.6
  Bottom 0.305: v123.19,46.35 123.19,55.56 124.14,56.52 SV3.6
!DATA4
  Top 0.305: E1.31 104.46,35.88 120.65,35.88 123.83,39.05 SV2.12 125.09,39.05 126.36,39.05 SV2.11
!DATA5
  Top 0.305: E1.30 102.23,34.61 102.87,35.24 122.56,35.24 123.83,36.51 SV2.10 125.09,36.51 126.36,36.51 SV2.9
!DATA6
  Top 0.305: E1.29 101.6,33.02 101.6,32.38 122.24,32.38 123.83,33.97 SV2.8 125.09,33.97 126.36,33.97 SV2.7
!DATA7
  Top 0.305: E1.26 99.69,33.02 99.69,31.11 122.24,31.11 123.83,29.53 SV2.4 125.09,28.89 126.36,28.89 SV2.3
!DATA8  (via drill 0.51)
  Top 0.305: v38.73,32.7 39.05,32.38 85.09,32.38 85.09,33.02 E1.4
  Bottom 0.305: v38.73,32.7 29.21,23.18 29.21,19.68 14.61,5.08 14.61,4.45 DR1.1
!DATA9  (via drill 0.51)
  Top 0.305: v84.45,36.83 84.45,34.61 E1.3
  Bottom 0.305: v84.45,36.83 84.77,37.15 84.77,38.1 85.41,38.73 85.41,47.31 83.5,49.21 83.5,111.76 82.23,113.03 82.23,125.09 65.09,142.24 65.09,145.41 70.17,150.5 70.17,159.38 71.12,160.34 79.69,160.34 79.69,168.91 80.96,170.18 128.91,170.18 128.91,6.67 124.14,1.91 71.44,1.91 71.44,2.22 67.94,5.71 54.29,5.71 54.29,4.13 52.7,2.54 41.91,2.54 41.91,30.8 38.1,34.61 34.61,34.61 34.61,31.75 11.43,8.57 11.43,4.45 DS1.1
!DATA10  (via drill 0.51)
  Top 0.305: v29.53,32.7 31.43,32.7 33.97,35.24 83.82,35.24 83.82,34.61 E1.2
  Bottom 0.305: v29.53,32.7 5.08,8.26 5.08,4.45 DU1.1
!DATA11  (via drill 0.51)
  Top 0.305: v37.15,33.66 83.19,33.66 E1.1
  Bottom 0.305: v37.15,33.66 12.38,8.89 12.38,3.49 11.43,2.54 1.91,2.54 1.91,3.17 DV1.1
!DF_SEL_ER
  Top 0.305: R22.1 Q3.3 44.45,92.71 | IC2.5 39.05,77.47 40.01,78.42 J4.2 41.27,79.06 44.45,82.23 44.45,92.71 | Q2.3 45.72,100.33 45.09,100.97 J2.2 44.45,92.71
!DONE_SKIP  (via drill 0.51)
  Top 0.305: v110.81,48.58 96.84,48.58 96.84,49.21 E1.59
  Bottom 0.305: v110.81,48.58 115.57,43.81 115.57,23.81 120.97,18.41 120.97,5.4 121.92,4.45 CB1.1
!INT_RQST  (via drill 0.51)
  Top 0.305: v91.76,28.89 91.76,33.02 E1.14
  Bottom 0.305: v91.76,28.89 91.76,8.57 87.63,4.45 CP1.1
!INTERNAL_IO  (via drill 0.51)
  Top 0.305: v94.3,26.35 94.3,33.02 E1.18
  Bottom 0.305: v94.3,26.35 94.93,25.72 94.93,6.03 96.52,4.45 CL1.1
!IO_PAUSE  (via drill 0.51)
  Top 0.305: v102.87,28.89 98.11,28.89 98.11,33.02 E1.24
  Bottom 0.305: v102.87,28.89 115.57,16.19 115.57,4.45 CD1.1
!MD03  (via drill 0.51)
  Top 0.305: v110.49,43.81 110.17,44.13 104.46,44.13 E1.44 | SV3.14 125.09,66.99 126.36,66.99 SV3.13
  Bottom 0.305: v110.49,43.81 113.03,41.27 113.03,19.37 120.33,12.06 120.33,4.13 121.92,2.54 124.14,2.54 124.14,20.95 128.27,25.08 128.27,65.72 127.32,66.67 SV3.13
!MD04
  Top 0.305: E1.35 104.46,38.42 116.52,38.42 128.91,50.8 128.91,60.96 124.14,60.96 123.19,60.01 123.19,55.24 124.14,55.24 SV3.4 125.09,54.29 126.36,54.29 SV3.3
!MD05  (via drill 0.51)
  Top 0.305: v122.87,43.5 117.16,37.78 104.46,37.78 E1.34 | SV3.1 126.36,51.75 125.09,51.75 SV3.2
  Bottom 0.305: v122.87,43.5 123.19,43.81 123.19,45.09 124.14,46.04 124.14,51.44 SV3.2
!MD06
  Top 0.305: E1.33 104.46,37.15 117.79,37.15 124.46,43.81 SV2.16 125.09,44.13 126.36,44.13 SV2.15 127.32,43.81 128.27,43.81 128.27,26.35 127.32,25.4 14.29,25.4 14.29,26.67 8.26,32.7 6.67,32.7 6.67,35.24 7.62,36.2 E31.4
!MD07  (via drill 0.51)
  Top 0.305: SV2.13 126.36,41.59 125.09,41.59 SV2.14 123.83,41.59 118.75,36.51 104.46,36.51 E1.32 103.19,36.51 v99.69,36.51 | v92.71,27.94 14.61,27.94 8.26,34.29 E31.5
  Bottom 0.305: v92.71,27.94 94.93,30.16 94.93,37.47 96.84,39.37 | 96.84,39.37 100.01,42.55 100.01,59.05 101.28,60.33 W2W1.1 | 96.84,39.37 v99.69,36.51
!MD08  (via drill 0.51)
  Top 0.305: v100.97,38.1 89.22,38.1 89.22,34.61 E1.10 | E31.6 7.62,31.11 14.61,24.13 18.1,24.13 29.84,12.38 29.84,4.45 DK1.1 | v13.34,47.94 27.94,62.55 102.23,62.55 103.5,61.28 W4W3.1
  Bottom 0.305: v100.97,38.1 103.82,40.96 103.82,60.33 W4W3.1 | v13.34,47.94 8.57,43.18 8.57,33.34 7.62,32.38 E31.6
!MD09  (via drill 0.51)
  Top 0.305: v87.63,35.56 88.58,35.56 88.58,34.61 E1.9 | v86.36,5.4 71.44,5.4 70.48,4.45 55.88,4.45 v55.56,4.76 | v55.56,0.95 55.56,0.64 27.3,0.64 v26.99,0.95
  Bottom 0.305: v87.63,35.56 87.63,33.02 86.04,31.43 86.04,30.8 86.68,30.16 86.68,5.71 v86.36,5.4 | v55.56,0.95 v55.56,4.76 | v26.99,0.95 DL1.1
!MD10  (via drill 0.51)
  Top 0.305: v40.96,28.89 41.91,29.84 87.95,29.84 87.95,33.02 E1.8
  Bottom 0.305: v40.96,28.89 24.13,12.06 24.13,4.45 DM1.1
!MD11  (via drill 0.51)
  Top 0.305: v40.64,30.48 87.31,30.48 87.31,33.02 E1.7
  Bottom 0.305: v40.64,30.48 17.78,7.62 17.78,4.45 DP1.1
!POWER_OK
  Top 0.305: E1.25 98.74,33.02 98.74,30.48 120.33,30.48 123.83,26.99 SV2.2 125.09,26.35 126.36,26.35 SV2.1
!SKIP  (via drill 0.51)
  Top 0.305: v84.77,28.89 90.49,28.89 90.49,31.11 89.85,31.75 89.85,33.02 E1.11
  Bottom 0.305: v84.77,28.89 81.28,25.4 81.28,4.45 CS1.1
!TR_SKIP  (via drill 0.51)
  Top 0.305: v75.88,49.21 82.23,49.21 84.14,47.31 96.2,47.31 96.2,49.21 E1.60
  Bottom 0.305: v75.88,49.21 53.66,26.99 53.66,5.4 52.7,4.45 DB1.1
-1.5V
  Top 0.305: D5.A D4.A 78.11,166.37 80.64,163.83 D3.C
  Bottom 0.305: C3.2 66.04,168.91 D5.A
-3V
  Top 0.305: C41.2 R29.1 | D1.A 71.75,171.45 74.3,168.91 D6.C
  Bottom 0.305: R29.1 73.66,151.76 80.33,158.43 80.33,167.32 81.28,168.28 D6.C
-4.7V
  Top 0.305: Q4.2 78.74,115.57 | 78.74,115.57 R35.2 81.28,114.94 83.19,113.03 R36.1 | 78.74,115.57 C48.2
-9V
  Top 0.305: 55.88,97.16 53.98,95.25 C44.2 | 55.88,97.16 57.78,95.25 R38.2 Q3.2 | 55.88,97.16 R37.1
-15V  (via drill 0.51)
  Top 0.305: DB2.1 53.02,8.57 53.98,7.62 120.65,7.62 121.6,8.57 CB2.1 | R35.1 R40.1 | R29.2 R39.1 68.58,140.34 56.52,128.27 | R30.1 R31.1 R32.1 R33.1 56.52,128.27 | R34.1 56.52,128.27 | v52.39,78.42 58.42,84.45 R38.1
  Bottom 0.305: R41.1 71.12,158.12 72.71,156.53 72.71,142.56 73.66,141.6 R29.2 73.66,139.06 81.28,131.44 R35.1 | R38.1 58.42,85.72 57.47,86.68 57.47,126.68 58.42,127.64 R34.1 | DB2.1 v52.39,78.42
BB  (via drill 0.51)
  Top 0.305: J5.2 28.26,90.17 | 28.26,90.17 IC1.3 | R8.1 30.48,135.25 28.57,133.35 R17.2 DRIVE.BB | 28.26,90.17 v28.26,91.76
  Bottom 0.305: v28.26,91.76 26.04,93.98 26.04,130.81 27.94,132.72 R17.2
BB-CPLD  (via drill 0.51)
  Top 0.305: J5.1 26.99,92.08 27.62,92.71 IC1.2 v33.66,92.71 | v75.88,47.94 80.96,47.94 E1.81 | v75.88,44.45 75.56,44.13 33.97,44.13 v33.66,44.45
  Bottom 0.305: IC1.2 IC1.1 | v75.88,44.45 v75.88,47.94 | v33.66,44.45 v33.66,92.71
CC_DTP  (via drill 0.51)
  Top 0.305: v114.94,45.72 105.41,45.72 105.09,46.04 104.46,46.04 E1.47
  Bottom 0.305: v114.94,45.72 119.06,49.85 119.06,109.54 121.92,112.39 E08.13
CC_SETDLY  (via drill 0.51)
  Top 0.305: v92.08,37.15 92.39,37.15 92.39,34.61 E1.15
  Bottom 0.305: v92.08,37.15 98.74,43.81 98.74,103.5 109.22,113.98 109.22,136.84 113.35,140.97 113.35,141.92 114.3,142.88 E04.2
CC_T/M_EN
  Top 0.305: E1.57 98.11,50.8 98.11,57.78 113.35,57.78 124.14,68.58 127.32,68.58 128.27,69.53 128.27,130.18 125.09,133.35 R44.1 E04.11 120.97,134.3 120.97,135.89 114.94,141.92 102.55,141.92 94.61,149.86 WTM.3 WTM.2
CC_TPG_CLK  (via drill 0.51)
  Top 0.305: E1.89 80.96,42.86 17.46,42.86 15.88,44.45 E31.16 | v20.64,63.18 31.75,63.18 54.61,86.04 72.07,86.04 72.07,95.25 98.42,121.6 114.62,121.6 121.28,128.27 E04.9
  Bottom 0.305: E04.5 114.3,135.25 121.28,128.27 E04.9 | 16.51,42.55 15.24,43.81 E31.16 | 16.51,42.55 16.83,42.23 16.83,33.34 14.61,33.34 14.29,33.66 14.29,35.24 15.24,36.2 E31.13 | v20.64,63.18 16.51,59.05 16.51,42.55
CC_TT_EN  (via drill 0.51)
  Top 0.305: v120.02,54.29 117.16,51.44 101.6,51.44 101.6,50.8 E1.52
  Bottom 0.305: v120.02,54.29 120.33,54.61 120.33,103.19 121.92,104.78 E08.10
D
  Top 0.305: IC1.5 J3.2 | 30.16,162.88 30.48,163.19 R6.1 | 30.16,162.88 28.57,161.29 R15.2 25.72,161.29 23.5,159.07 DRIVE.D | 30.16,162.88 44.13,162.88 45.09,163.83 R18.1
  Bottom 0.305: IC1.5 38.1,88.27 43.18,93.34 43.18,136.21 45.4,138.43 45.4,146.05 43.5,147.96 43.5,160.97 45.72,163.19 R18.1
D-CPLD  (via drill 0.51)
  Top 0.305: J3.1 40.01,89.22 39.05,90.17 IC1.6 | v49.53,59.37 89.85,59.37 89.85,50.8 E1.70
  Bottom 0.305: v49.53,59.37 36.83,72.07 36.83,88.27 38.1,89.53 IC1.6
DD  (via drill 0.51)
  Top 0.305: v31.11,60.64 44.77,46.99 76.2,46.99 76.52,47.31 80.96,47.31 E1.82
  Bottom 0.305: v31.11,60.64 25.4,66.36 25.4,127.95 23.18,130.18 DRIVE.DD
F  (via drill 0.51)
  Top 0.305: v60.01,58.42 89.22,58.42 89.22,50.8 E1.71 | DRIVE.F 23.5,156.53 27.3,160.34 44.13,160.34 45.09,161.29 R21.1
  Bottom 0.305: v60.01,58.42 56.83,61.59 56.83,142.24 46.67,152.4 46.67,159.7 45.72,160.66 R21.1
FF
  Top 0.305: J6.2 27.3,80.96 28.26,80.01 IC2.3 | R7.1 30.48,130.18 28.57,128.27 R16.2 DRIVE.FF
  Bottom 0.305: IC2.3 30.48,80.64 29.21,81.92 29.21,110.17 26.67,112.71 26.67,126.36 27.94,127.64 R16.2
FF-CPLD  (via drill 0.51)
  Top 0.305: J6.1 IC2.2 IC2.1 | v79.38,46.35 79.69,46.67 80.96,46.67 E1.83
  Bottom 0.305: v79.38,46.35 78.11,47.62 78.11,55.56 77.47,56.2 63.18,56.2 61.28,54.29 53.34,54.29 53.34,78.74 52.7,79.38 50.48,79.38 50.48,51.75 36.51,37.78 32.07,37.78 32.07,80.33 30.48,81.92 IC2.2
GND  (via drill 0.51)
  Top 0.305: E1.76 86.04,49.21 86.04,48.58 95.57,48.58 95.57,49.21 E1.61 95.57,50.8 95.57,53.34 C2.2 | v83.5,37.78 82.23,37.78 E1.97 | v83.5,43.5 82.23,43.5 E1.88 | v91.12,35.56 91.12,34.61 E1.13 | v100.97,35.56 100.97,34.61 E1.28 | E1.40 104.46,41.59 v105.73,41.59 106.05,41.91 116.84,41.91 117.47,42.55 117.47,43.18 115.89,44.77 104.46,44.77 E1.45
  pour GND$: 0,0 129.54,0 129.54,177.8 0,177.8
IN1  (via drill 0.51)
  Top 0.305: R45.2 E08.3 114.3,114.94 121.28,107.95 E08.11 | E31.14 15.88,39.37 17.46,40.96 80.96,40.96 E1.92 82.23,40.96 91.76,40.96 v92.08,41.27
  Bottom 0.305: E31.11 13.65,33.34 13.65,37.15 15.24,38.73 E31.14 | v92.08,41.27 97.47,46.67 97.47,105.73 106.68,114.94 R45.2
IN2  (via drill 0.51)
  Top 0.305: E1.91 80.96,41.59 15.56,41.59 E31.15 | v51.44,63.5 60.33,72.39 123.19,72.39 123.19,108.58 121.92,109.86 E08.12
  Bottom 0.305: 15.24,41.27 16.19,40.32 16.19,35.88 15.24,34.92 E31.12 | v51.44,63.5 51.12,63.18 51.12,51.75 33.02,33.66 17.46,33.66 17.46,32.38 15.88,30.8 13.02,30.8 13.02,39.05 15.24,41.27 | 15.24,41.27 E31.15
IN3  (via drill 0.51)
  Top 0.305: v83.5,44.77 82.87,44.13 82.23,44.13 E1.87
  Bottom 0.305: v83.5,44.77 79.69,40.96 79.69,3.49 80.64,2.54 101.92,2.54 101.92,36.51 109.86,44.45 109.86,133.35 114.3,137.79 E04.4
INITIALIZE  (via drill 0.51)
  Top 0.305: v90.81,32.07 90.49,32.07 90.49,33.02 E1.12
  Bottom 0.305: v90.81,32.07 88.58,34.29 88.58,35.88 87.95,36.51 85.41,36.51 85.41,29.53 85.72,29.21 85.72,6.03 84.45,4.76 84.45,4.45 CR1.1
IO69
  Top 0.305: E04.3 R42.2 111.12,140.97 107.31,137.16 100.01,137.16 87.31,124.46 87.31,111.44 45.09,111.44 12.38,78.74 12.38,46.04 | 12.38,46.04 7.62,46.04 6.03,44.45 6.03,40.01 7.62,40.01 E31.3 | 12.38,46.04 76.2,46.04 76.83,45.4 80.96,45.4 E1.85
J  (via drill 0.51)
  Top 0.305: DRIVE.J 23.5,153.99 25.72,156.21 R14.2 28.57,156.21 30.48,158.12 R5.1 31.11,158.75 32.07,159.7 44.13,159.7 45.09,158.75 R23.1 | v58.74,58.42 59.69,57.47 88.58,57.47 88.58,50.8 E1.72
  Bottom 0.305: v58.74,58.42 54.93,62.23 54.93,139.7 55.56,140.34 55.56,142.88 45.72,152.72 R23.1
JJ  (via drill 0.51)
  Top 0.305: v84.45,39.05 82.23,39.05 E1.95 | v44.45,125.73 DRIVE.JJ | v82.55,73.66 79.38,76.83 v46.67,76.83
  Bottom 0.305: v84.45,39.05 84.45,46.35 82.55,48.26 v82.55,73.66 | v44.45,125.73 44.77,125.41 44.77,106.36 44.13,105.73 44.13,105.09 43.81,104.78 43.81,100.01 44.13,99.69 44.13,79.38 v46.67,76.83
L  (via drill 0.51)
  Top 0.305: v59.69,56.2 77.47,56.2 78.74,54.93 87.95,54.93 87.95,50.8 E1.73 | DRIVE.L 23.5,151.45 24.77,152.72 42.86,152.72 43.81,153.67 R19.1
  Bottom 0.305: v59.69,56.2 54.29,61.59 54.29,139.7 45.4,148.59 45.4,152.08 44.45,153.03 R19.1
LL  (via drill 0.51)
  Top 0.305: v78.74,38.42 80.96,38.42 E1.96 | R2.1 29.84,120.65 27.62,122.87 23.5,122.87 DRIVE.LL
  Bottom 0.305: R10.2 28.57,118.11 30.48,120.02 R2.1 | v78.74,38.42 79.06,38.73 79.06,44.77 80.33,46.04 80.33,125.09 47.94,157.48 47.94,163.19 46.35,164.78 21.59,164.78 21.59,124.78 22.54,123.83 DRIVE.LL
N$18
  Top 0.305: E1.86 80.96,44.77 76.83,44.77 76.2,45.4 11.75,45.4 8.26,41.91 E31.2
N$19
  Top 0.305: E1.94 80.96,39.69 37.15,39.69 36.51,40.32 17.78,40.32 15.88,38.42 10.16,38.42 7.62,40.96 6.99,40.96 6.67,41.27 6.67,44.45 E31.1
N$51
  Top 0.305: R48.2 55.24,148.59 56.83,147 61.91,147 62.87,146.05 Q1.2
  Bottom 0.305: D1.C 80.64,171.45 71.44,162.24 66.99,162.24 66.99,147.96 65.09,146.05 Q1.2
N$52
  Top 0.305: Q1.1 R41.2
  Bottom 0.305: D5.C 55.88,165.74 66.04,155.57 Q1.1
N$54
  Top 0.305: D3.A 71.75,163.83 74.3,161.29 D2.C
N$55
  Top 0.305: R40.2 85.72,120.65 83.19,123.19 D10.C
  Bottom 0.305: D9.C 66.04,108.58 78.74,121.28 D10.C
N$56
  Top 0.305: D6.A 71.75,168.91 73.66,167 81.28,167 D4.C
N$57
  Top 0.305: Q5.1 51.44,115.57 53.02,117.16 60.96,117.16 66.99,123.19 D10.A
N$58
  Top 0.305: Q3.1 65.41,97.79 55.88,107.31 D9.A
N$59
  Bottom 0.305: Q2.1 50.8,106.05 52.39,107.63 52.39,129.22 53.34,130.18 D8.A
N$60
  Top 0.305: Q4.1 D7.A
N$63
  Top 0.305: D8.C D7.C R39.2
N$77
  Bottom 0.305: E08.5 114.3,111.12 113.35,112.08 113.35,116.52 114.3,117.47 E08.2
N$78
  Top 0.305: C37.1 R24.1 111.12,102.87 113.67,105.41 E08.7
N$79
  Top 0.305: R25.1 C38.1 104.78,120.65 105.73,119.7 119.7,119.7 121.28,118.11 E08.15
N$81
  Top 0.305: C38.2 104.78,115.57 105.73,116.52 120.33,116.52 121.28,115.57 E08.14
N$82
  Top 0.305: E08.6 113.67,107.95 109.54,112.08 104.14,112.08 103.5,112.71 C37.2
N$94
  Top 0.305: C36.+ 118.43,172.09 118.43,156.84 124.46,156.84 R26.1
  Bottom 0.305: E04.15 121.92,144.15 124.46,146.69 R26.1
N$95
  Bottom 0.305: E04.14 121.92,141.6 118.43,145.1 118.43,151.76 C36.-
N$108
  Top 0.305: 100.33,126.68 98.74,128.27 R43.1 | C39.1 100.33,126.68 | 100.33,126.68 109.54,126.68 113.67,130.81 E04.7
N$110
  Top 0.305: E04.6 113.67,133.35 111.44,135.57 100.97,135.57 C39.2
N$111
  Bottom 0.305: R43.2 96.52,139.06 101.28,143.83 101.28,150.5 R46.1 101.28,151.76 101.28,154.62 R46A.1
N$112
  Top 0.305: E04.12 R28.2
N-CPLD  (via drill 0.51)
  Top 0.305: IC2.6 J4.1 | v48.58,61.59 48.58,59.05 53.34,54.29 87.31,54.29 87.31,50.8 E1.74
  Bottom 0.305: v48.58,61.59 39.37,70.8 39.37,78.11 38.1,79.38 IC2.6
N-DRIVE
  Top 0.305: J2.1 45.09,102.23 45.72,102.87 Q2.2 | R34.2 R33.2 R32.2 R31.2 R30.2 48.26,127.32 45.72,127.32 30.8,142.24 20,142.24 19.05,143.19 19.05,147.32 21.27,147.32 22.23,148.27 DRIVE.N
  Bottom 0.305: R9.1 29.84,153.67 24.13,147.96 23.18,147.96 DRIVE.N | R30.2 Q5.2 Q2.2
NN  (via drill 0.51)
  Top 0.305: v31.11,39.37 31.43,39.69 36.51,39.69 39.05,37.15 80.96,37.15 E1.98
  Bottom 0.305: v31.11,39.37 24.77,45.72 24.77,118.43 23.18,120.02 DRIVE.NN
PARITY
  Top 0.305: E1.58 97.47,50.8 97.47,59.69 108.9,59.69 118.75,69.53 123.83,69.53 SV3.16 125.09,69.53 126.36,69.53 SV3.15
RR  (via drill 0.51)
  Top 0.305: v36.2,38.73 38.42,36.51 80.96,36.51 E1.99 | R3.1 30.48,114.94 28.57,113.03 R12.2 27.62,113.35 27.3,113.35 23.18,117.47 DRIVE.RR
  Bottom 0.305: v36.2,38.73 32.7,42.23 32.7,107.63 27.94,112.39 R12.2
RUN
  Top 0.305: E1.27 100.33,33.02 100.33,31.75 SV2.6 125.09,31.43 126.36,31.43 SV2.5
T-CPLD  (via drill 0.51)
  Top 0.305: J1.2 48.9,145.41 49.53,146.05 R27.1 51.44,146.05 53.98,143.51 Q1.3 | v85.09,52.7 85.09,50.8 E1.77
  Bottom 0.305: v85.09,52.7 84.77,53.02 84.77,123.19 66.04,141.92 Q1.3
T-DRIVE
  Top 0.305: C47.1 R48.1 J1.1 43.81,146.69 43.5,147 32.07,147 31.11,146.05 R1.1 30.48,145.41 28.57,143.51 R11.2 DRIVE.T
TCK  (via drill 0.51)
  Top 0.305: v93.66,61.59 93.66,50.8 E1.64
  Bottom 0.305: v93.66,61.59 95.57,63.5 95.57,133.35 111.44,149.22 111.44,156.84 ISP.1
TDI
  Top 0.305: E1.6 86.68,33.02 86.68,31.75 21.91,31.75 15.88,37.78 7.62,37.78 3.81,41.59 3.81,152.4 23.81,152.4 26.67,155.26 86.68,155.26 97.79,166.37 110.49,166.37 ISP.9
TDO  (via drill 0.51)
  Top 0.305: v86.36,53.34 86.68,53.34 86.68,50.8 E1.75
  Bottom 0.305: v86.36,53.34 92.71,59.69 92.71,133.03 100.65,140.97 100.65,142.56 110.49,152.4 110.49,158.43 111.44,159.38 ISP.3
TMS  (via drill 0.51)
  Top 0.305: v93.34,32.07 93.66,32.07 93.66,33.02 E1.17
  Bottom 0.305: v93.34,32.07 92.08,33.34 92.08,35.88 91.12,36.83 91.12,48.9 95.57,53.34 95.57,62.55 96.84,63.82 96.84,127 108.9,139.06 108.9,139.7 113.03,143.83 113.03,160.97 112.08,161.93 ISP.5
TP3  (via drill 0.51)
  Top 0.305: v102.87,26.35 96.84,26.35 96.84,32.07 96.2,32.7 96.2,33.02 E1.21
  Bottom 0.305: v102.87,26.35 106.05,23.18 106.05,9.53 CH2.1
TP4  (via drill 0.51)
  Top 0.305: v95.89,31.75 94.93,31.75 94.93,33.02 E1.19 | v95.89,8.89 CJ2.1
  Bottom 0.305: v95.89,8.89 v95.89,31.75
TT  (via drill 0.51)
  Top 0.305: v33.34,35.88 80.96,35.88 E1.100
  Bottom 0.305: v33.34,35.88 24.13,45.09 24.13,113.98 23.18,114.94 DRIVE.TT
V  (via drill 0.51)
  Top 0.305: v45.4,61.59 54.93,52.07 84.45,52.07 84.45,50.8 E1.78
  Bottom 0.305: v45.4,61.59 36.2,70.8 36.2,127.95 | 36.2,127.95 36.2,129.86 44.45,138.11 R20.1 | 36.2,127.95 23.5,140.65 DRIVE.V
VCC  (via drill 0.51)
  Top 0.305: 85.72,40.32 v85.72,37.47 85.72,34.61 E1.5 | 85.72,40.32 82.23,40.32 E1.93 | 84.45,43.18 83.5,42.23 82.23,42.23 E1.90 | 84.45,43.18 84.45,46.04 82.23,46.04 E1.84 | 102.55,39.05 102.55,38.42 101.28,37.15 100.65,37.15 100.33,37.47 95.57,37.47 95.57,34.61 E1.20 | 102.55,39.05 103.19,39.05 E1.36 | 101.92,42.23 103.19,42.23 E1.41 | 101.92,42.23 100.97,41.27 100.97,39.05 102.55,39.05 | 84.45,43.18 85.41,42.23 94.3,42.23 | 94.3,42.23 101.92,42.23 | 85.72,40.32 92.39,40.32 94.3,42.23 | E1.68 91.12,50.8 91.12,53.02 C2.1 | v100.97,52.07 100.97,50.8 E1.53
  pour VCC$: 0,0 129.54,0 129.54,177.8 0,177.8
W2  (via drill 0.51)
  Top 0.305: v93.34,36.51 93.03,36.51 93.03,34.61 E1.16
  Bottom 0.305: v93.34,36.51 99.38,42.55 99.38,78.74 101.28,80.64 W2W1.3
W2W1  (via drill 0.51)
  Top 0.305: v101.92,45.4 103.19,45.4 E1.46
  Bottom 0.305: v101.92,45.4 101.92,59.69 102.87,60.64 102.87,69.53 101.92,70.48 W2W1.2
W3  (via drill 0.51)
  Top 0.305: v106.36,50.48 102.23,50.48 E1.51
  Bottom 0.305: v106.36,50.48 106.05,50.8 106.05,79.06 104.46,80.64 W4W3.3
W4W3  (via drill 0.51)
  Top 0.305: v105.73,46.67 104.46,46.67 E1.48
  Bottom 0.305: v105.73,46.67 105.41,46.99 105.41,69.53 104.46,70.48 W4W3.2
X  (via drill 0.51)
  Top 0.305: R4.1 30.48,140.34 28.57,138.43 R13.2 DRIVE.X | v44.13,61.59 54.29,51.44 83.82,51.44 83.82,50.8 E1.79
  Bottom 0.305: v44.13,61.59 35.24,70.48 35.24,128.27 25.4,138.11 23.5,138.11 DRIVE.X
Z  (via drill 0.51)
  Top 0.305: v48.26,50.8 83.19,50.8 E1.80
  Bottom 0.305: v48.26,50.8 34.61,64.45 34.61,128.27 27.3,135.57 23.5,135.57 DRIVE.Z

## Text on the board
tPlace: RX8E | A | TD8E | VV | BUFMOD | AB1 | AP1 | AR1 | AS11 | AU1 | AV1 | BK1 | BL1 | BM1 | BP1 | BR1 | BS1 | BU1 | RX8E | BU2 | BV1 | BV2
_tsilk: Lit.3V | B1 | CR2032H | 0.1uF | 74ABT540N | IC8 | 0.1uF | C1 | 74ACT20N | 100K | 22uF | 0.1uF | 62256 | 62256 | 200pF | C2 | IC7 | 2N3904 | 100K | DIS | EN | 7 | IC3 | 3 | 10K | IC4 | 5 | 1 | 6 | 2 | 4 | R5 | 0 | 0.1uF | 0.1uF | S1 | ON | 0.1uF | 74ABT245N | 74ABT245N | 0.1uF | 74ACT138N | 74HCT30N | 10K | 10K | 10K | IC2 | IC1 | C10 | 100uF | 10K | IC5 | IC6 | DV1 | DU1 | DT1 | DS1 | DR1 | DP1 | DN1 | DM1 | DL1 | DK1 | DJ1 | DH1 | DF1 | DE1 | DD1 | DC1 | DB1 | DA1 | CV1 | CU1 | CT1 | CS1 | CR1 | CP1 | CN1 | CM1 | CL1 | CK1 | CJ1 | CH1 | CF1 | CE1 | CD1 | CC1 | CB1 | CA1 | BV1 | BU1 | BT1 | BS1 | BR1 | BP1 | BN1 | BM1 | BL1 | BK1 | BJ1 | BH1 | BF1 | BE1 | BD1 | BC1 | BB1 | BA1 | AV1 | AU1 | AT1 | AS1 | AR1 | AP1 | AN1 | AM1 | AL1 | AK1 | AJ1 | AH1 | AF1 | AE1 | AD1 | AC1 | AB1 | AA1
_bsilk: DV2 | DU2 | DT2 | DS2 | DR2 | DP2 | DN2 | DM2 | DL2 | DK2 | DJ2 | DH2 | DF2 | DE2 | DD2 | DC2 | DB2 | DA2 | CV2 | CU2 | CT2 | CS2 | CR2 | CP2 | CN2 | CM2 | CL2 | CK2 | CJ2 | CH2 | CF2 | CE2 | CD2 | CC2 | CB2 | CA2 | BV2 | BU2 | BT2 | BS2 | BR2 | BP2 | BN2 | BM2 | BL2 | BK2 | BJ2 | BH2 | BF2 | BE2 | BD2 | BC2 | BB2 | BA2 | AV2 | AU2 | AT2 | AS2 | AR2 | AP2 | AN2 | AM2 | AL2 | AK2 | AJ2 | AH2 | AF2 | AE2 | AD2 | AC2 | AB2 | AA2